# Altium PCB Test.PcbDoc (part 6 of 9)
Units mm, origin at the board's own origin, x right, y up, seen from the top; angles counter-clockwise.
Board outline 152.4 x 101.6 mm, 2 copper layers (Top Layer, Bottom Layer); 1 components, 0 nets, 1713 pads, 1 vias.
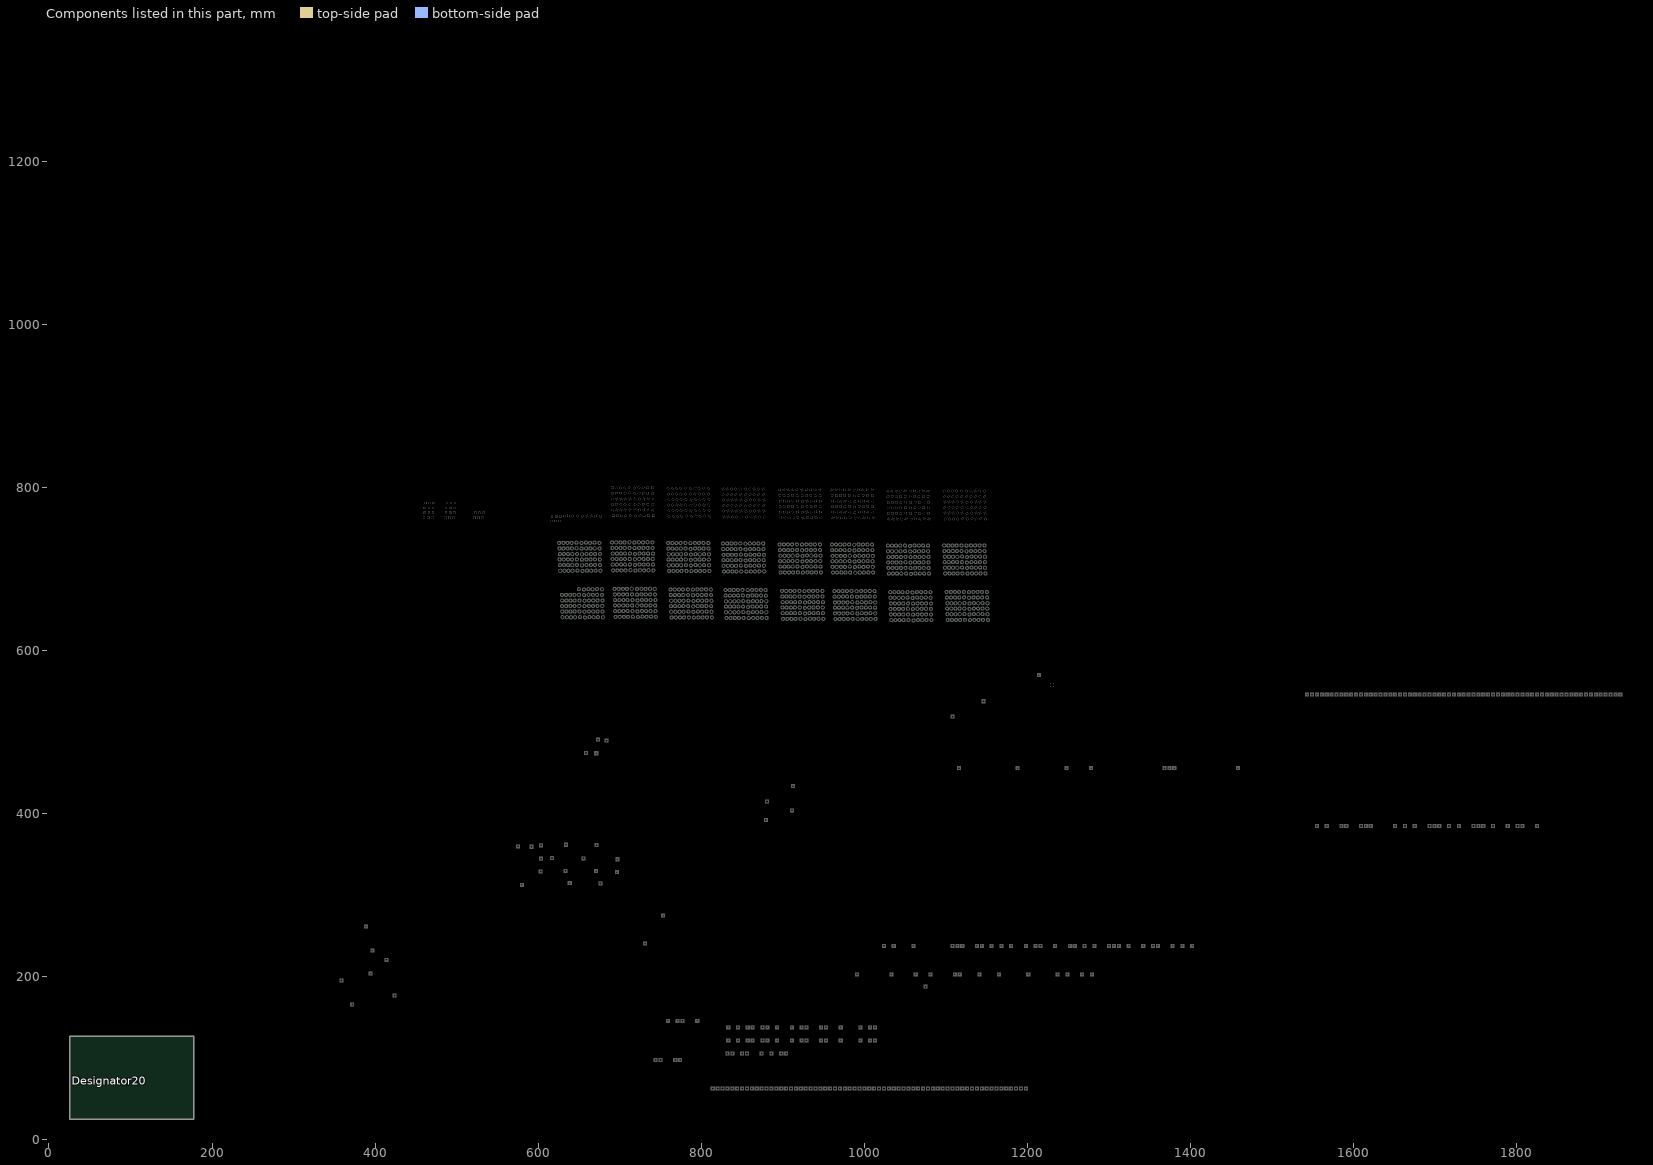
[diagram p6: the components of this part, seen from the top]

## Via types
v1: diameter 0.9, hole 0.4, Top Layer to Bottom Layer, 1 vias

## Nets (pads, with @x,y where several pads share a name; then routed paths per layer and width w, separated by ;. In a path a pad name is that pad's centre, name@x,y a point inside that pad or via, vN(x,y) a via of type N, cw(c..) or ccw(c..) an arc to the next point about the centre after c; other vN are vias at no path point) (continued)
copper on no net: (continued)
  Top Layer w0.25: 944.124,1205.232 ccw(c945.201,1204.559) 946.278,1203.886 947.052,1205.124 ccw(c945.975,1205.797) 944.898,1206.47 945.184,1205.232 ; 944.378,1191.643 ccw(c945.455,1190.97) 946.532,1190.297 947.306,1191.535 ccw(c946.229,1192.208) 945.152,1192.881 945.438,1191.643 ; 944.632,1184.785 ccw(c945.709,1184.112) 946.786,1183.439 947.56,1184.677 ccw(c946.483,1185.35) 945.406,1186.023 945.692,1184.785 ; 944.632,1198.247 ccw(c945.709,1197.574) 946.786,1196.901 947.56,1198.139 ccw(c946.483,1198.812) 945.406,1199.485 945.692,1198.247 ; 945.14,1177.8 ccw(c946.217,1177.127) 947.294,1176.454 948.068,1177.692 ccw(c946.991,1178.365) 945.914,1179.038 946.2,1177.8 ; 945.664,1335.632 947.818,1334.286 949.164,1336.44 947.01,1337.786 ; 945.918,1328.774 948.072,1327.428 949.418,1329.582 947.264,1330.928 ; 945.95,1269.09 ccw(c947.027,1268.417) 948.104,1267.744 948.878,1268.982 ccw(c947.801,1269.655) 946.724,1270.328 947.01,1269.09 ; 946.172,1315.185 948.326,1313.839 949.672,1315.993 947.518,1317.339 ; 946.204,1262.232 ccw(c947.281,1261.559) 948.358,1260.886 949.132,1262.124 ccw(c948.055,1262.797) 946.978,1263.47 947.264,1262.232 ; 946.426,1308.327 948.58,1306.981 949.926,1309.135 947.772,1310.481 ; 946.426,1321.789 948.58,1320.443 949.926,1322.597 947.772,1323.943 ; 946.458,1248.643 ccw(c947.535,1247.97) 948.612,1247.297 949.386,1248.535 ccw(c948.309,1249.208) 947.232,1249.881 947.518,1248.643 ; 946.712,1241.785 ccw(c947.789,1241.112) 948.866,1240.439 949.64,1241.677 ccw(c948.563,1242.35) 947.486,1243.023 947.772,1241.785 ; 946.712,1255.247 ccw(c947.789,1254.574) 948.866,1253.901 949.64,1255.139 ccw(c948.563,1255.812) 947.486,1256.485 947.772,1255.247 ; 946.934,1301.342 949.088,1299.996 950.434,1302.15 948.28,1303.496 ; 947.22,1234.8 ccw(c948.297,1234.127) 949.374,1233.454 950.148,1234.692 ccw(c949.071,1235.365) 947.994,1236.038 948.28,1234.8 ; 947.414,1334.959 947.414,1337.113 ; 947.668,1328.101 947.668,1330.255 ; 947.922,1314.512 947.922,1316.666 ; 948.176,1307.654 948.176,1309.808 ; 948.176,1321.116 948.176,1323.27 ; 948.684,1300.669 948.684,1302.823 ; 948.95,1212.09 ccw(c950.027,1211.417) 951.104,1210.744 951.878,1211.982 ccw(c950.801,1212.655) 949.724,1213.328 950.01,1212.09 ; 949.204,1205.232 ccw(c950.281,1204.559) 951.358,1203.886 952.132,1205.124 ccw(c951.055,1205.797) 949.978,1206.47 950.264,1205.232 ; 949.458,1191.643 ccw(c950.535,1190.97) 951.612,1190.297 952.386,1191.535 ccw(c951.309,1192.208) 950.232,1192.881 950.518,1191.643 ; 949.712,1184.785 ccw(c950.789,1184.112) 951.866,1183.439 952.64,1184.677 ccw(c951.563,1185.35) 950.486,1186.023 950.772,1184.785 ; 949.712,1198.247 ccw(c950.789,1197.574) 951.866,1196.901 952.64,1198.139 ccw(c951.563,1198.812) 950.486,1199.485 950.772,1198.247 ; 950.22,1177.8 ccw(c951.297,1177.127) 952.374,1176.454 953.148,1177.692 ccw(c952.071,1178.365) 950.994,1179.038 951.28,1177.8 ; 950.744,1335.632 952.898,1334.286 954.244,1336.44 952.09,1337.786 ; 950.998,1328.774 953.152,1327.428 954.498,1329.582 952.344,1330.928 ; 951.03,1269.09 ccw(c952.107,1268.417) 953.184,1267.744 953.958,1268.982 ccw(c952.881,1269.655) 951.804,1270.328 952.09,1269.09 ; 951.252,1315.185 953.406,1313.839 954.752,1315.993 952.598,1317.339 ; 951.284,1262.232 ccw(c952.361,1261.559) 953.438,1260.886 954.212,1262.124 ccw(c953.135,1262.797) 952.058,1263.47 952.344,1262.232 ; 951.506,1308.327 953.66,1306.981 955.006,1309.135 952.852,1310.481 ; 951.506,1321.789 953.66,1320.443 955.006,1322.597 952.852,1323.943 ; 951.538,1248.643 ccw(c952.615,1247.97) 953.692,1247.297 954.466,1248.535 ccw(c953.389,1249.208) 952.312,1249.881 952.598,1248.643 ; 951.792,1241.785 ccw(c952.869,1241.112) 953.946,1240.439 954.72,1241.677 ccw(c953.643,1242.35) 952.566,1243.023 952.852,1241.785 ; 951.792,1255.247 ccw(c952.869,1254.574) 953.946,1253.901 954.72,1255.139 ccw(c953.643,1255.812) 952.566,1256.485 952.852,1255.247 ; 952.014,1301.342 954.168,1299.996 955.514,1302.15 953.36,1303.496 ; 952.3,1234.8 ccw(c953.377,1234.127) 954.454,1233.454 955.228,1234.692 ccw(c954.151,1235.365) 953.074,1236.038 953.36,1234.8 ; 952.494,1334.959 952.494,1337.113 ; 952.748,1328.101 952.748,1330.255 ; 953.002,1314.512 953.002,1316.666 ; 953.256,1307.654 953.256,1309.808 ; 953.256,1321.116 953.256,1323.27 ; 953.764,1300.669 953.764,1302.823 ; 954.03,1212.09 ccw(c955.107,1211.417) 956.184,1210.744 956.958,1211.982 ccw(c955.881,1212.655) 954.804,1213.328 955.09,1212.09 ; 954.284,1205.232 ccw(c955.361,1204.559) 956.438,1203.886 957.212,1205.124 ccw(c956.135,1205.797) 955.058,1206.47 955.344,1205.232 ; 954.538,1191.643 ccw(c955.615,1190.97) 956.692,1190.297 957.466,1191.535 ccw(c956.389,1192.208) 955.312,1192.881 955.598,1191.643 ; 954.792,1184.785 ccw(c955.869,1184.112) 956.946,1183.439 957.72,1184.677 ccw(c956.643,1185.35) 955.566,1186.023 955.852,1184.785 ; 954.792,1198.247 ccw(c955.869,1197.574) 956.946,1196.901 957.72,1198.139 ccw(c956.643,1198.812) 955.566,1199.485 955.852,1198.247 ; 955.3,1177.8 ccw(c956.377,1177.127) 957.454,1176.454 958.228,1177.692 ccw(c957.151,1178.365) 956.074,1179.038 956.36,1177.8 ; 955.824,1335.632 957.978,1334.286 959.324,1336.44 957.17,1337.786 ; 956.078,1328.774 958.232,1327.428 959.578,1329.582 957.424,1330.928 ; 956.11,1269.09 ccw(c957.187,1268.417) 958.264,1267.744 959.038,1268.982 ccw(c957.961,1269.655) 956.884,1270.328 957.17,1269.09 ; 956.332,1315.185 958.486,1313.839 959.832,1315.993 957.678,1317.339 ; 956.364,1262.232 ccw(c957.441,1261.559) 958.518,1260.886 959.292,1262.124 ccw(c958.215,1262.797) 957.138,1263.47 957.424,1262.232 ; 956.586,1308.327 958.74,1306.981 960.086,1309.135 957.932,1310.481 ; 956.586,1321.789 958.74,1320.443 960.086,1322.597 957.932,1323.943 ; 956.618,1248.643 ccw(c957.695,1247.97) 958.772,1247.297 959.546,1248.535 ccw(c958.469,1249.208) 957.392,1249.881 957.678,1248.643 ; 956.872,1241.785 ccw(c957.949,1241.112) 959.026,1240.439 959.8,1241.677 ccw(c958.723,1242.35) 957.646,1243.023 957.932,1241.785 ; 956.872,1255.247 ccw(c957.949,1254.574) 959.026,1253.901 959.8,1255.139 ccw(c958.723,1255.812) 957.646,1256.485 957.932,1255.247 ; 957.094,1301.342 959.248,1299.996 960.594,1302.15 958.44,1303.496 ; 957.38,1234.8 ccw(c958.457,1234.127) 959.534,1233.454 960.308,1234.692 ccw(c959.231,1235.365) 958.154,1236.038 958.44,1234.8 ; 957.574,1334.959 957.574,1337.113 ; 957.828,1328.101 957.828,1330.255 ; 958.082,1314.512 958.082,1316.666 ; 958.336,1307.654 958.336,1309.808 ; 958.336,1321.116 958.336,1323.27 ; 958.844,1300.669 958.844,1302.823 ; 959.11,1212.09 ccw(c960.187,1211.417) 961.264,1210.744 962.038,1211.982 ccw(c960.961,1212.655) 959.884,1213.328 960.17,1212.09 ; 959.364,1205.232 ccw(c960.441,1204.559) 961.518,1203.886 962.292,1205.124 ccw(c961.215,1205.797) 960.138,1206.47 960.424,1205.232 ; 959.618,1191.643 ccw(c960.695,1190.97) 961.772,1190.297 962.546,1191.535 ccw(c961.469,1192.208) 960.392,1192.881 960.678,1191.643 ; 959.872,1184.785 ccw(c960.949,1184.112) 962.026,1183.439 962.8,1184.677 ccw(c961.723,1185.35) 960.646,1186.023 960.932,1184.785 ; 959.872,1198.247 ccw(c960.949,1197.574) 962.026,1196.901 962.8,1198.139 ccw(c961.723,1198.812) 960.646,1199.485 960.932,1198.247 ; 960.38,1177.8 ccw(c961.457,1177.127) 962.534,1176.454 963.308,1177.692 ccw(c962.231,1178.365) 961.154,1179.038 961.44,1177.8 ; 961.666,1335.759 963.82,1334.413 965.166,1336.567 963.012,1337.913 ; 961.92,1328.901 964.074,1327.555 965.42,1329.709 963.266,1331.055 ; 961.952,1269.217 ccw(c963.029,1268.544) 964.106,1267.871 964.88,1269.109 ccw(c963.803,1269.782) 962.726,1270.455 963.012,1269.217 ; 962.174,1315.312 964.328,1313.966 965.674,1316.12 963.52,1317.466 ; 962.206,1262.359 ccw(c963.283,1261.686) 964.36,1261.013 965.134,1262.251 ccw(c964.057,1262.924) 962.98,1263.597 963.266,1262.359 ; 962.428,1308.454 964.582,1307.108 965.928,1309.262 963.774,1310.608 ; 962.428,1321.916 964.582,1320.57 965.928,1322.724 963.774,1324.07 ; 962.46,1248.77 ccw(c963.537,1248.097) 964.614,1247.424 965.388,1248.662 ccw(c964.311,1249.335) 963.234,1250.008 963.52,1248.77 ; 962.714,1241.912 ccw(c963.791,1241.239) 964.868,1240.566 965.642,1241.804 ccw(c964.565,1242.477) 963.488,1243.15 963.774,1241.912 ; 962.714,1255.374 ccw(c963.791,1254.701) 964.868,1254.028 965.642,1255.266 ccw(c964.565,1255.939) 963.488,1256.612 963.774,1255.374 ; 962.936,1301.469 965.09,1300.123 966.436,1302.277 964.282,1303.623 ; 963.222,1234.927 ccw(c964.299,1234.254) 965.376,1233.581 966.15,1234.819 ccw(c965.073,1235.492) 963.996,1236.165 964.282,1234.927 ; 963.416,1335.086 963.416,1337.24 ; 963.67,1328.228 963.67,1330.382 ; 963.924,1314.639 963.924,1316.793 ; 964.178,1307.781 964.178,1309.935 ; 964.178,1321.243 964.178,1323.397 ; 964.686,1300.796 964.686,1302.95 ; 964.952,1212.217 ccw(c966.029,1211.544) 967.106,1210.871 967.88,1212.109 ccw(c966.803,1212.782) 965.726,1213.455 966.012,1212.217 ; 965.206,1205.359 ccw(c966.283,1204.686) 967.36,1204.013 968.134,1205.251 ccw(c967.057,1205.924) 965.98,1206.597 966.266,1205.359 ; 965.46,1191.77 ccw(c966.537,1191.097) 967.614,1190.424 968.388,1191.662 ccw(c967.311,1192.335) 966.234,1193.008 966.52,1191.77 ; 965.714,1184.912 ccw(c966.791,1184.239) 967.868,1183.566 968.642,1184.804 ccw(c967.565,1185.477) 966.488,1186.15 966.774,1184.912 ; 965.714,1198.374 ccw(c966.791,1197.701) 967.868,1197.028 968.642,1198.266 ccw(c967.565,1198.939) 966.488,1199.612 966.774,1198.374 ; 966.222,1177.927 ccw(c967.299,1177.254) 968.376,1176.581 969.15,1177.819 ccw(c968.073,1178.492) 966.996,1179.165 967.282,1177.927 ; 967.889,1335.378 970.043,1334.032 971.389,1336.186 969.235,1337.532 ; 968.143,1328.52 970.297,1327.174 971.643,1329.328 969.489,1330.674 ; 968.175,1268.836 ccw(c969.252,1268.163) 970.329,1267.49 971.103,1268.728 ccw(c970.026,1269.401) 968.949,1270.074 969.235,1268.836 ; 968.397,1314.931 970.551,1313.585 971.897,1315.739 969.743,1317.085 ; 968.429,1261.978 ccw(c969.506,1261.305) 970.583,1260.632 971.357,1261.87 ccw(c970.28,1262.543) 969.203,1263.216 969.489,1261.978 ; 968.651,1308.073 970.805,1306.727 972.151,1308.881 969.997,1310.227 ; 968.651,1321.535 970.805,1320.189 972.151,1322.343 969.997,1323.689 ; 968.683,1248.389 ccw(c969.76,1247.716) 970.837,1247.043 971.611,1248.281 ccw(c970.534,1248.954) 969.457,1249.627 969.743,1248.389 ; 968.937,1241.531 ccw(c970.014,1240.858) 971.091,1240.185 971.865,1241.423 ccw(c970.788,1242.096) 969.711,1242.769 969.997,1241.531 ; 968.937,1254.993 ccw(c970.014,1254.32) 971.091,1253.647 971.865,1254.885 ccw(c970.788,1255.558) 969.711,1256.231 969.997,1254.993 ; 969.159,1301.088 971.313,1299.742 972.659,1301.896 970.505,1303.242 ; 969.445,1234.546 ccw(c970.522,1233.873) 971.599,1233.2 972.373,1234.438 ccw(c971.296,1235.111) 970.219,1235.784 970.505,1234.546 ; 969.639,1334.705 969.639,1336.859 ; 969.893,1327.847 969.893,1330.001 ; 970.147,1314.258 970.147,1316.412 ; 970.401,1307.4 970.401,1309.554 ; 970.401,1320.862 970.401,1323.016 ; 970.909,1300.415 970.909,1302.569 ; 971.175,1211.836 ccw(c972.252,1211.163) 973.329,1210.49 974.103,1211.728 ccw(c973.026,1212.401) 971.949,1213.074 972.235,1211.836 ; 971.429,1204.978 ccw(c972.506,1204.305) 973.583,1203.632 974.357,1204.87 ccw(c973.28,1205.543) 972.203,1206.216 972.489,1204.978 ; 971.683,1191.389 ccw(c972.76,1190.716) 973.837,1190.043 974.611,1191.281 ccw(c973.534,1191.954) 972.457,1192.627 972.743,1191.389 ; 971.937,1184.531 ccw(c973.014,1183.858) 974.091,1183.185 974.865,1184.423 ccw(c973.788,1185.096) 972.711,1185.769 972.997,1184.531 ; 971.937,1197.993 ccw(c973.014,1197.32) 974.091,1196.647 974.865,1197.885 ccw(c973.788,1198.558) 972.711,1199.231 972.997,1197.993 ; 972.445,1177.546 ccw(c973.522,1176.873) 974.599,1176.2 975.373,1177.438 ccw(c974.296,1178.111) 973.219,1178.784 973.505,1177.546 ; 973.35,1335.759 975.504,1334.413 976.85,1336.567 974.696,1337.913 ; 973.604,1328.901 975.758,1327.555 977.104,1329.709 974.95,1331.055 ; 973.636,1269.217 ccw(c974.713,1268.544) 975.79,1267.871 976.564,1269.109 ccw(c975.487,1269.782) 974.41,1270.455 974.696,1269.217 ; 973.858,1315.312 976.012,1313.966 977.358,1316.12 975.204,1317.466 ; 973.89,1262.359 ccw(c974.967,1261.686) 976.044,1261.013 976.818,1262.251 ccw(c975.741,1262.924) 974.664,1263.597 974.95,1262.359 ; 974.112,1308.454 976.266,1307.108 977.612,1309.262 975.458,1310.608 ; 974.112,1321.916 976.266,1320.57 977.612,1322.724 975.458,1324.07 ; 974.144,1248.77 ccw(c975.221,1248.097) 976.298,1247.424 977.072,1248.662 ccw(c975.995,1249.335) 974.918,1250.008 975.204,1248.77 ; 974.398,1241.912 ccw(c975.475,1241.239) 976.552,1240.566 977.326,1241.804 ccw(c976.249,1242.477) 975.172,1243.15 975.458,1241.912 ; 974.398,1255.374 ccw(c975.475,1254.701) 976.552,1254.028 977.326,1255.266 ccw(c976.249,1255.939) 975.172,1256.612 975.458,1255.374 ; 974.62,1301.469 976.774,1300.123 978.12,1302.277 975.966,1303.623 ; 974.906,1234.927 ccw(c975.983,1234.254) 977.06,1233.581 977.834,1234.819 ccw(c976.757,1235.492) 975.68,1236.165 975.966,1234.927 ; 975.1,1335.086 975.1,1337.24 ; 975.354,1328.228 975.354,1330.382 ; 975.608,1314.639 975.608,1316.793 ; 975.862,1307.781 975.862,1309.935 ; 975.862,1321.243 975.862,1323.397 ; 976.37,1300.796 976.37,1302.95 ; 976.636,1212.217 ccw(c977.713,1211.544) 978.79,1210.871 979.564,1212.109 ccw(c978.487,1212.782) 977.41,1213.455 977.696,1212.217 ; 976.89,1205.359 ccw(c977.967,1204.686) 979.044,1204.013 979.818,1205.251 ccw(c978.741,1205.924) 977.664,1206.597 977.95,1205.359 ; 977.144,1191.77 ccw(c978.221,1191.097) 979.298,1190.424 980.072,1191.662 ccw(c978.995,1192.335) 977.918,1193.008 978.204,1191.77 ; 977.398,1184.912 ccw(c978.475,1184.239) 979.552,1183.566 980.326,1184.804 ccw(c979.249,1185.477) 978.172,1186.15 978.458,1184.912 ; 977.398,1198.374 ccw(c978.475,1197.701) 979.552,1197.028 980.326,1198.266 ccw(c979.249,1198.939) 978.172,1199.612 978.458,1198.374 ; 977.906,1177.927 ccw(c978.983,1177.254) 980.06,1176.581 980.834,1177.819 ccw(c979.757,1178.492) 978.68,1179.165 978.966,1177.927 ; 978.557,1335.632 980.711,1334.286 982.057,1336.44 979.903,1337.786 ; 978.811,1328.774 980.965,1327.428 982.311,1329.582 980.157,1330.928 ; 978.843,1269.09 ccw(c979.92,1268.417) 980.997,1267.744 981.771,1268.982 ccw(c980.694,1269.655) 979.617,1270.328 979.903,1269.09 ; 979.065,1315.185 981.219,1313.839 982.565,1315.993 980.411,1317.339 ; 979.097,1262.232 ccw(c980.174,1261.559) 981.251,1260.886 982.025,1262.124 ccw(c980.948,1262.797) 979.871,1263.47 980.157,1262.232 ; 979.319,1308.327 981.473,1306.981 982.819,1309.135 980.665,1310.481 ; 979.319,1321.789 981.473,1320.443 982.819,1322.597 980.665,1323.943 ; 979.351,1248.643 ccw(c980.428,1247.97) 981.505,1247.297 982.279,1248.535 ccw(c981.202,1249.208) 980.125,1249.881 980.411,1248.643 ; 979.605,1241.785 ccw(c980.682,1241.112) 981.759,1240.439 982.533,1241.677 ccw(c981.456,1242.35) 980.379,1243.023 980.665,1241.785 ; 979.605,1255.247 ccw(c980.682,1254.574) 981.759,1253.901 982.533,1255.139 ccw(c981.456,1255.812) 980.379,1256.485 980.665,1255.247 ; 979.827,1301.342 981.981,1299.996 983.327,1302.15 981.173,1303.496 ; 980.113,1234.8 ccw(c981.19,1234.127) 982.267,1233.454 983.041,1234.692 ccw(c981.964,1235.365) 980.887,1236.038 981.173,1234.8 ; 980.307,1334.959 980.307,1337.113 ; 980.561,1328.101 980.561,1330.255 ; 980.815,1314.512 980.815,1316.666 ; 981.069,1307.654 981.069,1309.808 ; 981.069,1321.116 981.069,1323.27 ; 981.577,1300.669 981.577,1302.823 ; 981.843,1212.09 ccw(c982.92,1211.417) 983.997,1210.744 984.771,1211.982 ccw(c983.694,1212.655) 982.617,1213.328 982.903,1212.09 ; 982.097,1205.232 ccw(c983.174,1204.559) 984.251,1203.886 985.025,1205.124 ccw(c983.948,1205.797) 982.871,1206.47 983.157,1205.232 ; 982.351,1191.643 ccw(c983.428,1190.97) 984.505,1190.297 985.279,1191.535 ccw(c984.202,1192.208) 983.125,1192.881 983.411,1191.643 ; 982.605,1184.785 ccw(c983.682,1184.112) 984.759,1183.439 985.533,1184.677 ccw(c984.456,1185.35) 983.379,1186.023 983.665,1184.785 ; 982.605,1198.247 ccw(c983.682,1197.574) 984.759,1196.901 985.533,1198.139 ccw(c984.456,1198.812) 983.379,1199.485 983.665,1198.247 ; 983.113,1177.8 ccw(c984.19,1177.127) 985.267,1176.454 986.041,1177.692 ccw(c984.964,1178.365) 983.887,1179.038 984.173,1177.8 ; 983.891,1335.759 986.045,1334.413 987.391,1336.567 985.237,1337.913 ; 984.145,1328.901 986.299,1327.555 987.645,1329.709 985.491,1331.055 ; 984.177,1269.217 ccw(c985.254,1268.544) 986.331,1267.871 987.105,1269.109 ccw(c986.028,1269.782) 984.951,1270.455 985.237,1269.217 ; 984.399,1315.312 986.553,1313.966 987.899,1316.12 985.745,1317.466 ; 984.431,1262.359 ccw(c985.508,1261.686) 986.585,1261.013 987.359,1262.251 ccw(c986.282,1262.924) 985.205,1263.597 985.491,1262.359 ; 984.653,1308.454 986.807,1307.108 988.153,1309.262 985.999,1310.608 ; 984.653,1321.916 986.807,1320.57 988.153,1322.724 985.999,1324.07 ; 984.685,1248.77 ccw(c985.762,1248.097) 986.839,1247.424 987.613,1248.662 ccw(c986.536,1249.335) 985.459,1250.008 985.745,1248.77 ; 984.939,1241.912 ccw(c986.016,1241.239) 987.093,1240.566 987.867,1241.804 ccw(c986.79,1242.477) 985.713,1243.15 985.999,1241.912 ; 984.939,1255.374 ccw(c986.016,1254.701) 987.093,1254.028 987.867,1255.266 ccw(c986.79,1255.939) 985.713,1256.612 985.999,1255.374 ; 985.161,1301.469 987.315,1300.123 988.661,1302.277 986.507,1303.623 ; 985.447,1234.927 ccw(c986.524,1234.254) 987.601,1233.581 988.375,1234.819 ccw(c987.298,1235.492) 986.221,1236.165 986.507,1234.927 ; 985.641,1335.086 985.641,1337.24 ; 985.895,1328.228 985.895,1330.382 ; 986.149,1314.639 986.149,1316.793 ; 986.403,1307.781 986.403,1309.935 ; 986.403,1321.243 986.403,1323.397 ; 986.911,1300.796 986.911,1302.95 ; 987.177,1212.217 ccw(c988.254,1211.544) 989.331,1210.871 990.105,1212.109 ccw(c989.028,1212.782) 987.951,1213.455 988.237,1212.217 ; 987.431,1205.359 ccw(c988.508,1204.686) 989.585,1204.013 990.359,1205.251 ccw(c989.282,1205.924) 988.205,1206.597 988.491,1205.359 ; 987.685,1191.77 ccw(c988.762,1191.097) 989.839,1190.424 990.613,1191.662 ccw(c989.536,1192.335) 988.459,1193.008 988.745,1191.77 ; 987.939,1184.912 ccw(c989.016,1184.239) 990.093,1183.566 990.867,1184.804 ccw(c989.79,1185.477) 988.713,1186.15 988.999,1184.912 ; 987.939,1198.374 ccw(c989.016,1197.701) 990.093,1197.028 990.867,1198.266 ccw(c989.79,1198.939) 988.713,1199.612 988.999,1198.374 ; 988.447,1177.927 ccw(c989.524,1177.254) 990.601,1176.581 991.375,1177.819 ccw(c990.298,1178.492) 989.221,1179.165 989.507,1177.927 ; 989.86,1335.632 992.014,1334.286 993.36,1336.44 991.206,1337.786 ; 990.114,1328.774 992.268,1327.428 993.614,1329.582 991.46,1330.928 ; 990.146,1269.09 ccw(c991.223,1268.417) 992.3,1267.744 993.074,1268.982 ccw(c991.997,1269.655) 990.92,1270.328 991.206,1269.09 ; 990.368,1315.185 992.522,1313.839 993.868,1315.993 991.714,1317.339 ; 990.4,1262.232 ccw(c991.477,1261.559) 992.554,1260.886 993.328,1262.124 ccw(c992.251,1262.797) 991.174,1263.47 991.46,1262.232 ; 990.622,1308.327 992.776,1306.981 994.122,1309.135 991.968,1310.481 ; 990.622,1321.789 992.776,1320.443 994.122,1322.597 991.968,1323.943 ; 990.654,1248.643 ccw(c991.731,1247.97) 992.808,1247.297 993.582,1248.535 ccw(c992.505,1249.208) 991.428,1249.881 991.714,1248.643 ; 990.908,1241.785 ccw(c991.985,1241.112) 993.062,1240.439 993.836,1241.677 ccw(c992.759,1242.35) 991.682,1243.023 991.968,1241.785 ; 990.908,1255.247 ccw(c991.985,1254.574) 993.062,1253.901 993.836,1255.139 ccw(c992.759,1255.812) 991.682,1256.485 991.968,1255.247 ; 991.13,1301.342 993.284,1299.996 994.63,1302.15 992.476,1303.496 ; 991.416,1234.8 ccw(c992.493,1234.127) 993.57,1233.454 994.344,1234.692 ccw(c993.267,1235.365) 992.19,1236.038 992.476,1234.8 ; 991.61,1334.959 991.61,1337.113 ; 991.864,1328.101 991.864,1330.255 ; 992.118,1314.512 992.118,1316.666 ; 992.372,1307.654 992.372,1309.808 ; 992.372,1321.116 992.372,1323.27 ; 992.88,1300.669 992.88,1302.823 ; 993.146,1212.09 ccw(c994.223,1211.417) 995.3,1210.744 996.074,1211.982 ccw(c994.997,1212.655) 993.92,1213.328 994.206,1212.09 ; 993.4,1205.232 ccw(c994.477,1204.559) 995.554,1203.886 996.328,1205.124 ccw(c995.251,1205.797) 994.174,1206.47 994.46,1205.232 ; 993.654,1191.643 ccw(c994.731,1190.97) 995.808,1190.297 996.582,1191.535 ccw(c995.505,1192.208) 994.428,1192.881 994.714,1191.643 ; 993.908,1184.785 ccw(c994.985,1184.112) 996.062,1183.439 996.836,1184.677 ccw(c995.759,1185.35) 994.682,1186.023 994.968,1184.785 ; 993.908,1198.247 ccw(c994.985,1197.574) 996.062,1196.901 996.836,1198.139 ccw(c995.759,1198.812) 994.682,1199.485 994.968,1198.247 ; 994.416,1177.8 ccw(c995.493,1177.127) 996.57,1176.454 997.344,1177.692 ccw(c996.267,1178.365) 995.19,1179.038 995.476,1177.8 ; 1009.644,1334.324 1009.644,1336.478 ; 1009.898,1327.466 1009.898,1329.62 ; 1010.048,1337.151 1007.894,1335.805 1009.24,1333.651 1011.394,1334.997 ; 1010.152,1313.877 1010.152,1316.031 ; 1010.302,1330.293 1008.148,1328.947 1009.494,1326.793 1011.648,1328.139 ; 1010.334,1269.693 ccw(c1009.257,1269.02) 1008.18,1268.347 1008.954,1267.109 ccw(c1010.031,1267.782) 1011.108,1268.455 1011.394,1269.693 ; 1010.406,1307.019 1010.406,1309.173 ; 1010.406,1320.481 1010.406,1322.635 ; 1010.556,1316.704 1008.402,1315.358 1009.748,1313.204 1011.902,1314.55 ; 1010.588,1262.835 ccw(c1009.511,1262.162) 1008.434,1261.489 1009.208,1260.251 ccw(c1010.285,1260.924) 1011.362,1261.597 1011.648,1262.835 ; 1010.81,1309.846 1008.656,1308.5 1010.002,1306.346 1012.156,1307.692 ; 1010.81,1323.308 1008.656,1321.962 1010.002,1319.808 1012.156,1321.154 ; 1010.842,1249.246 ccw(c1009.765,1248.573) 1008.688,1247.9 1009.462,1246.662 ccw(c1010.539,1247.335) 1011.616,1248.008 1011.902,1249.246 ; 1010.914,1300.034 1010.914,1302.188 ; 1011.096,1242.388 ccw(c1010.019,1241.715) 1008.942,1241.042 1009.716,1239.804 ccw(c1010.793,1240.477) 1011.87,1241.15 1012.156,1242.388 ; 1011.096,1255.85 ccw(c1010.019,1255.177) 1008.942,1254.504 1009.716,1253.266 ccw(c1010.793,1253.939) 1011.87,1254.612 1012.156,1255.85 ; 1011.318,1302.861 1009.164,1301.515 1010.51,1299.361 1012.664,1300.707 ; 1011.604,1235.403 ccw(c1010.527,1234.73) 1009.45,1234.057 1010.224,1232.819 ccw(c1011.301,1233.492) 1012.378,1234.165 1012.664,1235.403 ; 1013.334,1212.693 ccw(c1012.257,1212.02) 1011.18,1211.347 1011.954,1210.109 ccw(c1013.031,1210.782) 1014.108,1211.455 1014.394,1212.693 ; 1013.588,1205.835 ccw(c1012.511,1205.162) 1011.434,1204.489 1012.208,1203.251 ccw(c1013.285,1203.924) 1014.362,1204.597 1014.648,1205.835 ; 1013.842,1192.246 ccw(c1012.765,1191.573) 1011.688,1190.9 1012.462,1189.662 ccw(c1013.539,1190.335) 1014.616,1191.008 1014.902,1192.246 ; 1014.096,1185.388 ccw(c1013.019,1184.715) 1011.942,1184.042 1012.716,1182.804 ccw(c1013.793,1183.477) 1014.87,1184.15 1015.156,1185.388 ; 1014.096,1198.85 ccw(c1013.019,1198.177) 1011.942,1197.504 1012.716,1196.266 ccw(c1013.793,1196.939) 1014.87,1197.612 1015.156,1198.85 ; 1014.604,1178.403 ccw(c1013.527,1177.73) 1012.45,1177.057 1013.224,1175.819 ccw(c1014.301,1176.492) 1015.378,1177.165 1015.664,1178.403 ; 1014.724,1334.324 1014.724,1336.478 ; 1014.978,1327.466 1014.978,1329.62 ; 1015.128,1337.151 1012.974,1335.805 1014.32,1333.651 1016.474,1334.997 ; 1015.232,1313.877 1015.232,1316.031 ; 1015.382,1330.293 1013.228,1328.947 1014.574,1326.793 1016.728,1328.139 ; 1015.414,1269.693 ccw(c1014.337,1269.02) 1013.26,1268.347 1014.034,1267.109 ccw(c1015.111,1267.782) 1016.188,1268.455 1016.474,1269.693 ; 1015.486,1307.019 1015.486,1309.173 ; 1015.486,1320.481 1015.486,1322.635 ; 1015.636,1316.704 1013.482,1315.358 1014.828,1313.204 1016.982,1314.55 ; 1015.668,1262.835 ccw(c1014.591,1262.162) 1013.514,1261.489 1014.288,1260.251 ccw(c1015.365,1260.924) 1016.442,1261.597 1016.728,1262.835 ; 1015.89,1309.846 1013.736,1308.5 1015.082,1306.346 1017.236,1307.692 ; 1015.89,1323.308 1013.736,1321.962 1015.082,1319.808 1017.236,1321.154 ; 1015.922,1249.246 ccw(c1014.845,1248.573) 1013.768,1247.9 1014.542,1246.662 ccw(c1015.619,1247.335) 1016.696,1248.008 1016.982,1249.246 ; 1015.994,1300.034 1015.994,1302.188 ; 1016.176,1242.388 ccw(c1015.099,1241.715) 1014.022,1241.042 1014.796,1239.804 ccw(c1015.873,1240.477) 1016.95,1241.15 1017.236,1242.388 ; 1016.176,1255.85 ccw(c1015.099,1255.177) 1014.022,1254.504 1014.796,1253.266 ccw(c1015.873,1253.939) 1016.95,1254.612 1017.236,1255.85 ; 1016.398,1302.861 1014.244,1301.515 1015.59,1299.361 1017.744,1300.707 ; 1016.684,1235.403 ccw(c1015.607,1234.73) 1014.53,1234.057 1015.304,1232.819 ccw(c1016.381,1233.492) 1017.458,1234.165 1017.744,1235.403 ; 1018.414,1212.693 ccw(c1017.337,1212.02) 1016.26,1211.347 1017.034,1210.109 ccw(c1018.111,1210.782) 1019.188,1211.455 1019.474,1212.693 ; 1018.668,1205.835 ccw(c1017.591,1205.162) 1016.514,1204.489 1017.288,1203.251 ccw(c1018.365,1203.924) 1019.442,1204.597 1019.728,1205.835 ; 1018.922,1192.246 ccw(c1017.845,1191.573) 1016.768,1190.9 1017.542,1189.662 ccw(c1018.619,1190.335) 1019.696,1191.008 1019.982,1192.246 ; 1019.176,1185.388 ccw(c1018.099,1184.715) 1017.022,1184.042 1017.796,1182.804 ccw(c1018.873,1183.477) 1019.95,1184.15 1020.236,1185.388 ; 1019.176,1198.85 ccw(c1018.099,1198.177) 1017.022,1197.504 1017.796,1196.266 ccw(c1018.873,1196.939) 1019.95,1197.612 1020.236,1198.85 ; 1019.684,1178.403 ccw(c1018.607,1177.73) 1017.53,1177.057 1018.304,1175.819 ccw(c1019.381,1176.492) 1020.458,1177.165 1020.744,1178.403 ; 1019.804,1334.324 1019.804,1336.478 ; 1020.058,1327.466 1020.058,1329.62 ; 1020.208,1337.151 1018.054,1335.805 1019.4,1333.651 1021.554,1334.997 ; 1020.312,1313.877 1020.312,1316.031 ; 1020.462,1330.293 1018.308,1328.947 1019.654,1326.793 1021.808,1328.139 ; 1020.494,1269.693 ccw(c1019.417,1269.02) 1018.34,1268.347 1019.114,1267.109 ccw(c1020.191,1267.782) 1021.268,1268.455 1021.554,1269.693 ; 1020.566,1307.019 1020.566,1309.173 ; 1020.566,1320.481 1020.566,1322.635 ; 1020.716,1316.704 1018.562,1315.358 1019.908,1313.204 1022.062,1314.55 ; 1020.748,1262.835 ccw(c1019.671,1262.162) 1018.594,1261.489 1019.368,1260.251 ccw(c1020.445,1260.924) 1021.522,1261.597 1021.808,1262.835 ; 1020.97,1309.846 1018.816,1308.5 1020.162,1306.346 1022.316,1307.692 ; 1020.97,1323.308 1018.816,1321.962 1020.162,1319.808 1022.316,1321.154 ; 1021.002,1249.246 ccw(c1019.925,1248.573) 1018.848,1247.9 1019.622,1246.662 ccw(c1020.699,1247.335) 1021.776,1248.008 1022.062,1249.246 ; 1021.074,1300.034 1021.074,1302.188 ; 1021.256,1242.388 ccw(c1020.179,1241.715) 1019.102,1241.042 1019.876,1239.804 ccw(c1020.953,1240.477) 1022.03,1241.15 1022.316,1242.388 ; 1021.256,1255.85 ccw(c1020.179,1255.177) 1019.102,1254.504 1019.876,1253.266 ccw(c1020.953,1253.939) 1022.03,1254.612 1022.316,1255.85 ; 1021.478,1302.861 1019.324,1301.515 1020.67,1299.361 1022.824,1300.707 ; 1021.764,1235.403 ccw(c1020.687,1234.73) 1019.61,1234.057 1020.384,1232.819 ccw(c1021.461,1233.492) 1022.538,1234.165 1022.824,1235.403 ; 1023.494,1212.693 ccw(c1022.417,1212.02) 1021.34,1211.347 1022.114,1210.109 ccw(c1023.191,1210.782) 1024.268,1211.455 1024.554,1212.693 ; 1023.748,1205.835 ccw(c1022.671,1205.162) 1021.594,1204.489 1022.368,1203.251 ccw(c1023.445,1203.924) 1024.522,1204.597 1024.808,1205.835 ; 1024.002,1192.246 ccw(c1022.925,1191.573) 1021.848,1190.9 1022.622,1189.662 ccw(c1023.699,1190.335) 1024.776,1191.008 1025.062,1192.246 ; 1024.256,1185.388 ccw(c1023.179,1184.715) 1022.102,1184.042 1022.876,1182.804 ccw(c1023.953,1183.477) 1025.03,1184.15 1025.316,1185.388 ; 1024.256,1198.85 ccw(c1023.179,1198.177) 1022.102,1197.504 1022.876,1196.266 ccw(c1023.953,1196.939) 1025.03,1197.612 1025.316,1198.85 ; 1024.764,1178.403 ccw(c1023.687,1177.73) 1022.61,1177.057 1023.384,1175.819 ccw(c1024.461,1176.492) 1025.538,1177.165 1025.824,1178.403 ; 1024.884,1334.324 1024.884,1336.478 ; 1025.138,1327.466 1025.138,1329.62 ; 1025.288,1337.151 1023.134,1335.805 1024.48,1333.651 1026.634,1334.997 ; 1025.392,1313.877 1025.392,1316.031 ; 1025.542,1330.293 1023.388,1328.947 1024.734,1326.793 1026.888,1328.139 ; 1025.574,1269.693 ccw(c1024.497,1269.02) 1023.42,1268.347 1024.194,1267.109 ccw(c1025.271,1267.782) 1026.348,1268.455 1026.634,1269.693 ; 1025.646,1307.019 1025.646,1309.173 ; 1025.646,1320.481 1025.646,1322.635 ; 1025.796,1316.704 1023.642,1315.358 1024.988,1313.204 1027.142,1314.55 ; 1025.828,1262.835 ccw(c1024.751,1262.162) 1023.674,1261.489 1024.448,1260.251 ccw(c1025.525,1260.924) 1026.602,1261.597 1026.888,1262.835 ; 1026.05,1309.846 1023.896,1308.5 1025.242,1306.346 1027.396,1307.692 ; 1026.05,1323.308 1023.896,1321.962 1025.242,1319.808 1027.396,1321.154 ; 1026.082,1249.246 ccw(c1025.005,1248.573) 1023.928,1247.9 1024.702,1246.662 ccw(c1025.779,1247.335) 1026.856,1248.008 1027.142,1249.246 ; 1026.154,1300.034 1026.154,1302.188 ; 1026.336,1242.388 ccw(c1025.259,1241.715) 1024.182,1241.042 1024.956,1239.804 ccw(c1026.033,1240.477) 1027.11,1241.15 1027.396,1242.388 ; 1026.336,1255.85 ccw(c1025.259,1255.177) 1024.182,1254.504 1024.956,1253.266 ccw(c1026.033,1253.939) 1027.11,1254.612 1027.396,1255.85 ; 1026.558,1302.861 1024.404,1301.515 1025.75,1299.361 1027.904,1300.707 ; 1026.844,1235.403 ccw(c1025.767,1234.73) 1024.69,1234.057 1025.464,1232.819 ccw(c1026.541,1233.492) 1027.618,1234.165 1027.904,1235.403 ; 1028.574,1212.693 ccw(c1027.497,1212.02) 1026.42,1211.347 1027.194,1210.109 ccw(c1028.271,1210.782) 1029.348,1211.455 1029.634,1212.693 ; 1028.828,1205.835 ccw(c1027.751,1205.162) 1026.674,1204.489 1027.448,1203.251 ccw(c1028.525,1203.924) 1029.602,1204.597 1029.888,1205.835 ; 1029.082,1192.246 ccw(c1028.005,1191.573) 1026.928,1190.9 1027.702,1189.662 ccw(c1028.779,1190.335) 1029.856,1191.008 1030.142,1192.246 ; 1029.336,1185.388 ccw(c1028.259,1184.715) 1027.182,1184.042 1027.956,1182.804 ccw(c1029.033,1183.477) 1030.11,1184.15 1030.396,1185.388 ; 1029.336,1198.85 ccw(c1028.259,1198.177) 1027.182,1197.504 1027.956,1196.266 ccw(c1029.033,1196.939) 1030.11,1197.612 1030.396,1198.85 ; 1029.844,1178.403 ccw(c1028.767,1177.73) 1027.69,1177.057 1028.464,1175.819 ccw(c1029.541,1176.492) 1030.618,1177.165 1030.904,1178.403 ; 1030.726,1334.451 1030.726,1336.605 ; 1030.98,1327.593 1030.98,1329.747 ; 1031.13,1337.278 1028.976,1335.932 1030.322,1333.778 1032.476,1335.124 ; 1031.234,1314.004 1031.234,1316.158 ; 1031.384,1330.42 1029.23,1329.074 1030.576,1326.92 1032.73,1328.266 ; 1031.416,1269.82 ccw(c1030.339,1269.147) 1029.262,1268.474 1030.036,1267.236 ccw(c1031.113,1267.909) 1032.19,1268.582 1032.476,1269.82 ; 1031.488,1307.146 1031.488,1309.3 ; 1031.488,1320.608 1031.488,1322.762 ; 1031.638,1316.831 1029.484,1315.485 1030.83,1313.331 1032.984,1314.677 ; 1031.67,1262.962 ccw(c1030.593,1262.289) 1029.516,1261.616 1030.29,1260.378 ccw(c1031.367,1261.051) 1032.444,1261.724 1032.73,1262.962 ; 1031.892,1309.973 1029.738,1308.627 1031.084,1306.473 1033.238,1307.819 ; 1031.892,1323.435 1029.738,1322.089 1031.084,1319.935 1033.238,1321.281 ; 1031.924,1249.373 ccw(c1030.847,1248.7) 1029.77,1248.027 1030.544,1246.789 ccw(c1031.621,1247.462) 1032.698,1248.135 1032.984,1249.373 ; 1031.996,1300.161 1031.996,1302.315 ; 1032.178,1242.515 ccw(c1031.101,1241.842) 1030.024,1241.169 1030.798,1239.931 ccw(c1031.875,1240.604) 1032.952,1241.277 1033.238,1242.515 ; 1032.178,1255.977 ccw(c1031.101,1255.304) 1030.024,1254.631 1030.798,1253.393 ccw(c1031.875,1254.066) 1032.952,1254.739 1033.238,1255.977 ; 1032.4,1302.988 1030.246,1301.642 1031.592,1299.488 1033.746,1300.834 ; 1032.686,1235.53 ccw(c1031.609,1234.857) 1030.532,1234.184 1031.306,1232.946 ccw(c1032.383,1233.619) 1033.46,1234.292 1033.746,1235.53 ; 1034.416,1212.82 ccw(c1033.339,1212.147) 1032.262,1211.474 1033.036,1210.236 ccw(c1034.113,1210.909) 1035.19,1211.582 1035.476,1212.82 ; 1034.67,1205.962 ccw(c1033.593,1205.289) 1032.516,1204.616 1033.29,1203.378 ccw(c1034.367,1204.051) 1035.444,1204.724 1035.73,1205.962 ; 1034.924,1192.373 ccw(c1033.847,1191.7) 1032.77,1191.027 1033.544,1189.789 ccw(c1034.621,1190.462) 1035.698,1191.135 1035.984,1192.373 ; 1035.178,1185.515 ccw(c1034.101,1184.842) 1033.024,1184.169 1033.798,1182.931 ccw(c1034.875,1183.604) 1035.952,1184.277 1036.238,1185.515 ; 1035.178,1198.977 ccw(c1034.101,1198.304) 1033.024,1197.631 1033.798,1196.393 ccw(c1034.875,1197.066) 1035.952,1197.739 1036.238,1198.977 ; 1035.686,1178.53 ccw(c1034.609,1177.857) 1033.532,1177.184 1034.306,1175.946 ccw(c1035.383,1176.619) 1036.46,1177.292 1036.746,1178.53 ; 1036.949,1334.07 1036.949,1336.224 ; 1037.203,1327.212 1037.203,1329.366 ; 1037.353,1336.897 1035.199,1335.551 1036.545,1333.397 1038.699,1334.743 ; 1037.457,1313.623 1037.457,1315.777 ; 1037.607,1330.039 1035.453,1328.693 1036.799,1326.539 1038.953,1327.885 ; 1037.639,1269.439 ccw(c1036.562,1268.766) 1035.485,1268.093 1036.259,1266.855 ccw(c1037.336,1267.528) 1038.413,1268.201 1038.699,1269.439 ; 1037.711,1306.765 1037.711,1308.919 ; 1037.711,1320.227 1037.711,1322.381 ; 1037.861,1316.45 1035.707,1315.104 1037.053,1312.95 1039.207,1314.296 ; 1037.893,1262.581 ccw(c1036.816,1261.908) 1035.739,1261.235 1036.513,1259.997 ccw(c1037.59,1260.67) 1038.667,1261.343 1038.953,1262.581 ; 1038.115,1309.592 1035.961,1308.246 1037.307,1306.092 1039.461,1307.438 ; 1038.115,1323.054 1035.961,1321.708 1037.307,1319.554 1039.461,1320.9 ; 1038.147,1248.992 ccw(c1037.07,1248.319) 1035.993,1247.646 1036.767,1246.408 ccw(c1037.844,1247.081) 1038.921,1247.754 1039.207,1248.992 ; 1038.219,1299.78 1038.219,1301.934 ; 1038.401,1242.134 ccw(c1037.324,1241.461) 1036.247,1240.788 1037.021,1239.55 ccw(c1038.098,1240.223) 1039.175,1240.896 1039.461,1242.134 ; 1038.401,1255.596 ccw(c1037.324,1254.923) 1036.247,1254.25 1037.021,1253.012 ccw(c1038.098,1253.685) 1039.175,1254.358 1039.461,1255.596 ; 1038.623,1302.607 1036.469,1301.261 1037.815,1299.107 1039.969,1300.453 ; 1038.909,1235.149 ccw(c1037.832,1234.476) 1036.755,1233.803 1037.529,1232.565 ccw(c1038.606,1233.238) 1039.683,1233.911 1039.969,1235.149 ; 1040.639,1212.439 ccw(c1039.562,1211.766) 1038.485,1211.093 1039.259,1209.855 ccw(c1040.336,1210.528) 1041.413,1211.201 1041.699,1212.439 ; 1040.893,1205.581 ccw(c1039.816,1204.908) 1038.739,1204.235 1039.513,1202.997 ccw(c1040.59,1203.67) 1041.667,1204.343 1041.953,1205.581 ; 1041.147,1191.992 ccw(c1040.07,1191.319) 1038.993,1190.646 1039.767,1189.408 ccw(c1040.844,1190.081) 1041.921,1190.754 1042.207,1191.992 ; 1041.401,1185.134 ccw(c1040.324,1184.461) 1039.247,1183.788 1040.021,1182.55 ccw(c1041.098,1183.223) 1042.175,1183.896 1042.461,1185.134 ; 1041.401,1198.596 ccw(c1040.324,1197.923) 1039.247,1197.25 1040.021,1196.012 ccw(c1041.098,1196.685) 1042.175,1197.358 1042.461,1198.596 ; 1041.909,1178.149 ccw(c1040.832,1177.476) 1039.755,1176.803 1040.529,1175.565 ccw(c1041.606,1176.238) 1042.683,1176.911 1042.969,1178.149 ; 1042.41,1334.451 1042.41,1336.605 ; 1042.664,1327.593 1042.664,1329.747 ; 1042.814,1337.278 1040.66,1335.932 1042.006,1333.778 1044.16,1335.124 ; 1042.918,1314.004 1042.918,1316.158 ; 1043.068,1330.42 1040.914,1329.074 1042.26,1326.92 1044.414,1328.266 ; 1043.1,1269.82 ccw(c1042.023,1269.147) 1040.946,1268.474 1041.72,1267.236 ccw(c1042.797,1267.909) 1043.874,1268.582 1044.16,1269.82 ; 1043.172,1307.146 1043.172,1309.3 ; 1043.172,1320.608 1043.172,1322.762 ; 1043.322,1316.831 1041.168,1315.485 1042.514,1313.331 1044.668,1314.677 ; 1043.354,1262.962 ccw(c1042.277,1262.289) 1041.2,1261.616 1041.974,1260.378 ccw(c1043.051,1261.051) 1044.128,1261.724 1044.414,1262.962 ; 1043.576,1309.973 1041.422,1308.627 1042.768,1306.473 1044.922,1307.819 ; 1043.576,1323.435 1041.422,1322.089 1042.768,1319.935 1044.922,1321.281 ; 1043.608,1249.373 ccw(c1042.531,1248.7) 1041.454,1248.027 1042.228,1246.789 ccw(c1043.305,1247.462) 1044.382,1248.135 1044.668,1249.373 ; 1043.68,1300.161 1043.68,1302.315 ; 1043.862,1242.515 ccw(c1042.785,1241.842) 1041.708,1241.169 1042.482,1239.931 ccw(c1043.559,1240.604) 1044.636,1241.277 1044.922,1242.515 ; 1043.862,1255.977 ccw(c1042.785,1255.304) 1041.708,1254.631 1042.482,1253.393 ccw(c1043.559,1254.066) 1044.636,1254.739 1044.922,1255.977 ; 1044.084,1302.988 1041.93,1301.642 1043.276,1299.488 1045.43,1300.834 ; 1044.37,1235.53 ccw(c1043.293,1234.857) 1042.216,1234.184 1042.99,1232.946 ccw(c1044.067,1233.619) 1045.144,1234.292 1045.43,1235.53 ; 1046.1,1212.82 ccw(c1045.023,1212.147) 1043.946,1211.474 1044.72,1210.236 ccw(c1045.797,1210.909) 1046.874,1211.582 1047.16,1212.82 ; 1046.354,1205.962 ccw(c1045.277,1205.289) 1044.2,1204.616 1044.974,1203.378 ccw(c1046.051,1204.051) 1047.128,1204.724 1047.414,1205.962 ; 1046.608,1192.373 ccw(c1045.531,1191.7) 1044.454,1191.027 1045.228,1189.789 ccw(c1046.305,1190.462) 1047.382,1191.135 1047.668,1192.373 ; 1046.862,1185.515 ccw(c1045.785,1184.842) 1044.708,1184.169 1045.482,1182.931 ccw(c1046.559,1183.604) 1047.636,1184.277 1047.922,1185.515 ; 1046.862,1198.977 ccw(c1045.785,1198.304) 1044.708,1197.631 1045.482,1196.393 ccw(c1046.559,1197.066) 1047.636,1197.739 1047.922,1198.977 ; 1047.37,1178.53 ccw(c1046.293,1177.857) 1045.216,1177.184 1045.99,1175.946 ccw(c1047.067,1176.619) 1048.144,1177.292 1048.43,1178.53 ; 1047.617,1334.324 1047.617,1336.478 ; 1047.871,1327.466 1047.871,1329.62 ; 1048.021,1337.151 1045.867,1335.805 1047.213,1333.651 1049.367,1334.997 ; 1048.125,1313.877 1048.125,1316.031 ; 1048.275,1330.293 1046.121,1328.947 1047.467,1326.793 1049.621,1328.139 ; 1048.307,1269.693 ccw(c1047.23,1269.02) 1046.153,1268.347 1046.927,1267.109 ccw(c1048.004,1267.782) 1049.081,1268.455 1049.367,1269.693 ; 1048.379,1307.019 1048.379,1309.173 ; 1048.379,1320.481 1048.379,1322.635 ; 1048.529,1316.704 1046.375,1315.358 1047.721,1313.204 1049.875,1314.55 ; 1048.561,1262.835 ccw(c1047.484,1262.162) 1046.407,1261.489 1047.181,1260.251 ccw(c1048.258,1260.924) 1049.335,1261.597 1049.621,1262.835 ; 1048.783,1309.846 1046.629,1308.5 1047.975,1306.346 1050.129,1307.692 ; 1048.783,1323.308 1046.629,1321.962 1047.975,1319.808 1050.129,1321.154 ; 1048.815,1249.246 ccw(c1047.738,1248.573) 1046.661,1247.9 1047.435,1246.662 ccw(c1048.512,1247.335) 1049.589,1248.008 1049.875,1249.246 ; 1048.887,1300.034 1048.887,1302.188 ; 1049.069,1242.388 ccw(c1047.992,1241.715) 1046.915,1241.042 1047.689,1239.804 ccw(c1048.766,1240.477) 1049.843,1241.15 1050.129,1242.388 ; 1049.069,1255.85 ccw(c1047.992,1255.177) 1046.915,1254.504 1047.689,1253.266 ccw(c1048.766,1253.939) 1049.843,1254.612 1050.129,1255.85 ; 1049.291,1302.861 1047.137,1301.515 1048.483,1299.361 1050.637,1300.707 ; 1049.577,1235.403 ccw(c1048.5,1234.73) 1047.423,1234.057 1048.197,1232.819 ccw(c1049.274,1233.492) 1050.351,1234.165 1050.637,1235.403 ; 1051.307,1212.693 ccw(c1050.23,1212.02) 1049.153,1211.347 1049.927,1210.109 ccw(c1051.004,1210.782) 1052.081,1211.455 1052.367,1212.693 ; 1051.561,1205.835 ccw(c1050.484,1205.162) 1049.407,1204.489 1050.181,1203.251 ccw(c1051.258,1203.924) 1052.335,1204.597 1052.621,1205.835 ; 1051.815,1192.246 ccw(c1050.738,1191.573) 1049.661,1190.9 1050.435,1189.662 ccw(c1051.512,1190.335) 1052.589,1191.008 1052.875,1192.246 ; 1052.069,1185.388 ccw(c1050.992,1184.715) 1049.915,1184.042 1050.689,1182.804 ccw(c1051.766,1183.477) 1052.843,1184.15 1053.129,1185.388 ; 1052.069,1198.85 ccw(c1050.992,1198.177) 1049.915,1197.504 1050.689,1196.266 ccw(c1051.766,1196.939) 1052.843,1197.612 1053.129,1198.85 ; 1052.577,1178.403 ccw(c1051.5,1177.73) 1050.423,1177.057 1051.197,1175.819 ccw(c1052.274,1176.492) 1053.351,1177.165 1053.637,1178.403 ; 1052.951,1334.451 1052.951,1336.605 ; 1053.205,1327.593 1053.205,1329.747 ; 1053.355,1337.278 1051.201,1335.932 1052.547,1333.778 1054.701,1335.124 ; 1053.459,1314.004 1053.459,1316.158 ; 1053.609,1330.42 1051.455,1329.074 1052.801,1326.92 1054.955,1328.266 ; 1053.641,1269.82 ccw(c1052.564,1269.147) 1051.487,1268.474 1052.261,1267.236 ccw(c1053.338,1267.909) 1054.415,1268.582 1054.701,1269.82 ; 1053.713,1307.146 1053.713,1309.3 ; 1053.713,1320.608 1053.713,1322.762 ; 1053.863,1316.831 1051.709,1315.485 1053.055,1313.331 1055.209,1314.677 ; 1053.895,1262.962 ccw(c1052.818,1262.289) 1051.741,1261.616 1052.515,1260.378 ccw(c1053.592,1261.051) 1054.669,1261.724 1054.955,1262.962 ; 1054.117,1309.973 1051.963,1308.627 1053.309,1306.473 1055.463,1307.819 ; 1054.117,1323.435 1051.963,1322.089 1053.309,1319.935 1055.463,1321.281 ; 1054.149,1249.373 ccw(c1053.072,1248.7) 1051.995,1248.027 1052.769,1246.789 ccw(c1053.846,1247.462) 1054.923,1248.135 1055.209,1249.373 ; 1054.221,1300.161 1054.221,1302.315 ; 1054.403,1242.515 ccw(c1053.326,1241.842) 1052.249,1241.169 1053.023,1239.931 ccw(c1054.1,1240.604) 1055.177,1241.277 1055.463,1242.515 ; 1054.403,1255.977 ccw(c1053.326,1255.304) 1052.249,1254.631 1053.023,1253.393 ccw(c1054.1,1254.066) 1055.177,1254.739 1055.463,1255.977 ; 1054.625,1302.988 1052.471,1301.642 1053.817,1299.488 1055.971,1300.834 ; 1054.911,1235.53 ccw(c1053.834,1234.857) 1052.757,1234.184 1053.531,1232.946 ccw(c1054.608,1233.619) 1055.685,1234.292 1055.971,1235.53 ; 1056.641,1212.82 ccw(c1055.564,1212.147) 1054.487,1211.474 1055.261,1210.236 ccw(c1056.338,1210.909) 1057.415,1211.582 1057.701,1212.82 ; 1056.895,1205.962 ccw(c1055.818,1205.289) 1054.741,1204.616 1055.515,1203.378 ccw(c1056.592,1204.051) 1057.669,1204.724 1057.955,1205.962 ; 1057.149,1192.373 ccw(c1056.072,1191.7) 1054.995,1191.027 1055.769,1189.789 ccw(c1056.846,1190.462) 1057.923,1191.135 1058.209,1192.373 ; 1057.403,1185.515 ccw(c1056.326,1184.842) 1055.249,1184.169 1056.023,1182.931 ccw(c1057.1,1183.604) 1058.177,1184.277 1058.463,1185.515 ; 1057.403,1198.977 ccw(c1056.326,1198.304) 1055.249,1197.631 1056.023,1196.393 ccw(c1057.1,1197.066) 1058.177,1197.739 1058.463,1198.977 ; 1057.911,1178.53 ccw(c1056.834,1177.857) 1055.757,1177.184 1056.531,1175.946 ccw(c1057.608,1176.619) 1058.685,1177.292 1058.971,1178.53 ; 1058.92,1334.324 1058.92,1336.478 ; 1059.174,1327.466 1059.174,1329.62 ; 1059.324,1337.151 1057.17,1335.805 1058.516,1333.651 1060.67,1334.997 ; 1059.428,1313.877 1059.428,1316.031 ; 1059.578,1330.293 1057.424,1328.947 1058.77,1326.793 1060.924,1328.139 ; 1059.61,1269.693 ccw(c1058.533,1269.02) 1057.456,1268.347 1058.23,1267.109 ccw(c1059.307,1267.782) 1060.384,1268.455 1060.67,1269.693 ; 1059.682,1307.019 1059.682,1309.173 ; 1059.682,1320.481 1059.682,1322.635 ; 1059.832,1316.704 1057.678,1315.358 1059.024,1313.204 1061.178,1314.55 ; 1059.864,1262.835 ccw(c1058.787,1262.162) 1057.71,1261.489 1058.484,1260.251 ccw(c1059.561,1260.924) 1060.638,1261.597 1060.924,1262.835 ; 1060.086,1309.846 1057.932,1308.5 1059.278,1306.346 1061.432,1307.692 ; 1060.086,1323.308 1057.932,1321.962 1059.278,1319.808 1061.432,1321.154 ; 1060.118,1249.246 ccw(c1059.041,1248.573) 1057.964,1247.9 1058.738,1246.662 ccw(c1059.815,1247.335) 1060.892,1248.008 1061.178,1249.246 ; 1060.19,1300.034 1060.19,1302.188 ; 1060.372,1242.388 ccw(c1059.295,1241.715) 1058.218,1241.042 1058.992,1239.804 ccw(c1060.069,1240.477) 1061.146,1241.15 1061.432,1242.388 ; 1060.372,1255.85 ccw(c1059.295,1255.177) 1058.218,1254.504 1058.992,1253.266 ccw(c1060.069,1253.939) 1061.146,1254.612 1061.432,1255.85 ; 1060.594,1302.861 1058.44,1301.515 1059.786,1299.361 1061.94,1300.707 ; 1060.88,1235.403 ccw(c1059.803,1234.73) 1058.726,1234.057 1059.5,1232.819 ccw(c1060.577,1233.492) 1061.654,1234.165 1061.94,1235.403 ; 1062.61,1212.693 ccw(c1061.533,1212.02) 1060.456,1211.347 1061.23,1210.109 ccw(c1062.307,1210.782) 1063.384,1211.455 1063.67,1212.693 ; 1062.864,1205.835 ccw(c1061.787,1205.162) 1060.71,1204.489 1061.484,1203.251 ccw(c1062.561,1203.924) 1063.638,1204.597 1063.924,1205.835 ; 1063.118,1192.246 ccw(c1062.041,1191.573) 1060.964,1190.9 1061.738,1189.662 ccw(c1062.815,1190.335) 1063.892,1191.008 1064.178,1192.246 ; 1063.372,1185.388 ccw(c1062.295,1184.715) 1061.218,1184.042 1061.992,1182.804 ccw(c1063.069,1183.477) 1064.146,1184.15 1064.432,1185.388 ; 1063.372,1198.85 ccw(c1062.295,1198.177) 1061.218,1197.504 1061.992,1196.266 ccw(c1063.069,1196.939) 1064.146,1197.612 1064.432,1198.85 ; 1063.88,1178.403 ccw(c1062.803,1177.73) 1061.726,1177.057 1062.5,1175.819 ccw(c1063.577,1176.492) 1064.654,1177.165 1064.94,1178.403 ; 1077.629,1335.27 1078.101,1332.774 1080.597,1333.246 1080.125,1335.742 ; 1077.883,1328.412 1078.355,1325.916 1080.851,1326.388 1080.379,1328.884 ; 1078.137,1314.823 1078.609,1312.327 1081.105,1312.799 1080.633,1315.295 ; 1078.16,1268.37 ccw(c1078.396,1267.122) 1078.631,1265.875 1080.066,1266.146 ccw(c1079.83,1267.394) 1079.595,1268.641 1080.125,1268.37 ; 1078.391,1307.965 1078.863,1305.469 1081.359,1305.941 1080.887,1308.437 ; 1078.391,1321.427 1078.863,1318.931 1081.359,1319.403 1080.887,1321.899 ; 1078.414,1261.512 ccw(c1078.65,1260.264) 1078.885,1259.017 1080.32,1259.288 ccw(c1080.084,1260.536) 1079.849,1261.783 1080.379,1261.512 ; 1078.668,1247.923 ccw(c1078.904,1246.675) 1079.139,1245.428 1080.574,1245.699 ccw(c1080.338,1246.947) 1080.103,1248.194 1080.633,1247.923 ; 1078.899,1300.98 1079.371,1298.484 1081.867,1298.956 1081.395,1301.452 ; 1078.922,1241.065 ccw(c1079.158,1239.817) 1079.393,1238.57 1080.828,1238.841 ccw(c1080.592,1240.089) 1080.357,1241.336 1080.887,1241.065 ; 1078.922,1254.527 ccw(c1079.158,1253.279) 1079.393,1252.032 1080.828,1252.303 ccw(c1080.592,1253.551) 1080.357,1254.798 1080.887,1254.527 ; 1079.113,1334.022 1079.113,1334.494 ; 1079.367,1327.164 1079.367,1327.636 ; 1079.43,1234.08 ccw(c1079.666,1232.832) 1079.901,1231.585 1081.336,1231.856 ccw(c1081.1,1233.104) 1080.865,1234.351 1081.395,1234.08 ; 1079.621,1313.575 1079.621,1314.047 ; 1079.875,1306.717 1079.875,1307.189 ; 1079.875,1320.179 1079.875,1320.651 ; 1080.383,1299.732 1080.383,1300.204 ; 1081.16,1211.37 ccw(c1081.396,1210.122) 1081.631,1208.875 1083.066,1209.146 ccw(c1082.83,1210.394) 1082.595,1211.641 1083.125,1211.37 ; 1081.414,1204.512 ccw(c1081.65,1203.264) 1081.885,1202.017 1083.32,1202.288 ccw(c1083.084,1203.536) 1082.849,1204.783 1083.379,1204.512 ; 1081.668,1190.923 ccw(c1081.904,1189.675) 1082.139,1188.428 1083.574,1188.699 ccw(c1083.338,1189.947) 1083.103,1191.194 1083.633,1190.923 ; 1081.922,1184.065 ccw(c1082.158,1182.817) 1082.393,1181.57 1083.828,1181.841 ccw(c1083.592,1183.089) 1083.357,1184.336 1083.887,1184.065 ; 1081.922,1197.527 ccw(c1082.158,1196.279) 1082.393,1195.032 1083.828,1195.303 ccw(c1083.592,1196.551) 1083.357,1197.798 1083.887,1197.527 ; 1082.43,1177.08 ccw(c1082.666,1175.832) 1082.901,1174.585 1084.336,1174.856 ccw(c1084.1,1176.104) 1083.865,1177.351 1084.395,1177.08 ; 1082.709,1335.27 1083.181,1332.774 1085.677,1333.246 1085.205,1335.742 ; 1082.963,1328.412 1083.435,1325.916 1085.931,1326.388 1085.459,1328.884 ; 1083.217,1314.823 1083.689,1312.327 1086.185,1312.799 1085.713,1315.295 ; 1083.24,1268.37 ccw(c1083.476,1267.122) 1083.711,1265.875 1085.146,1266.146 ccw(c1084.91,1267.394) 1084.675,1268.641 1085.205,1268.37 ; 1083.471,1307.965 1083.943,1305.469 1086.439,1305.941 1085.967,1308.437 ; 1083.471,1321.427 1083.943,1318.931 1086.439,1319.403 1085.967,1321.899 ; 1083.494,1261.512 ccw(c1083.73,1260.264) 1083.965,1259.017 1085.4,1259.288 ccw(c1085.164,1260.536) 1084.929,1261.783 1085.459,1261.512 ; 1083.748,1247.923 ccw(c1083.984,1246.675) 1084.219,1245.428 1085.654,1245.699 ccw(c1085.418,1246.947) 1085.183,1248.194 1085.713,1247.923 ; 1083.979,1300.98 1084.451,1298.484 1086.947,1298.956 1086.475,1301.452 ; 1084.002,1241.065 ccw(c1084.238,1239.817) 1084.473,1238.57 1085.908,1238.841 ccw(c1085.672,1240.089) 1085.437,1241.336 1085.967,1241.065 ; 1084.002,1254.527 ccw(c1084.238,1253.279) 1084.473,1252.032 1085.908,1252.303 ccw(c1085.672,1253.551) 1085.437,1254.798 1085.967,1254.527 ; 1084.193,1334.022 1084.193,1334.494 ; 1084.447,1327.164 1084.447,1327.636 ; 1084.51,1234.08 ccw(c1084.746,1232.832) 1084.981,1231.585 1086.416,1231.856 ccw(c1086.18,1233.104) 1085.945,1234.351 1086.475,1234.08 ; 1084.701,1313.575 1084.701,1314.047 ; 1084.955,1306.717 1084.955,1307.189 ; 1084.955,1320.179 1084.955,1320.651 ; 1085.463,1299.732 1085.463,1300.204 ; 1086.24,1211.37 ccw(c1086.476,1210.122) 1086.711,1208.875 1088.146,1209.146 ccw(c1087.91,1210.394) 1087.675,1211.641 1088.205,1211.37 ; 1086.494,1204.512 ccw(c1086.73,1203.264) 1086.965,1202.017 1088.4,1202.288 ccw(c1088.164,1203.536) 1087.929,1204.783 1088.459,1204.512 ; 1086.748,1190.923 ccw(c1086.984,1189.675) 1087.219,1188.428 1088.654,1188.699 ccw(c1088.418,1189.947) 1088.183,1191.194 1088.713,1190.923